# EAGLE board PrePSU (EAGLE 5.07)
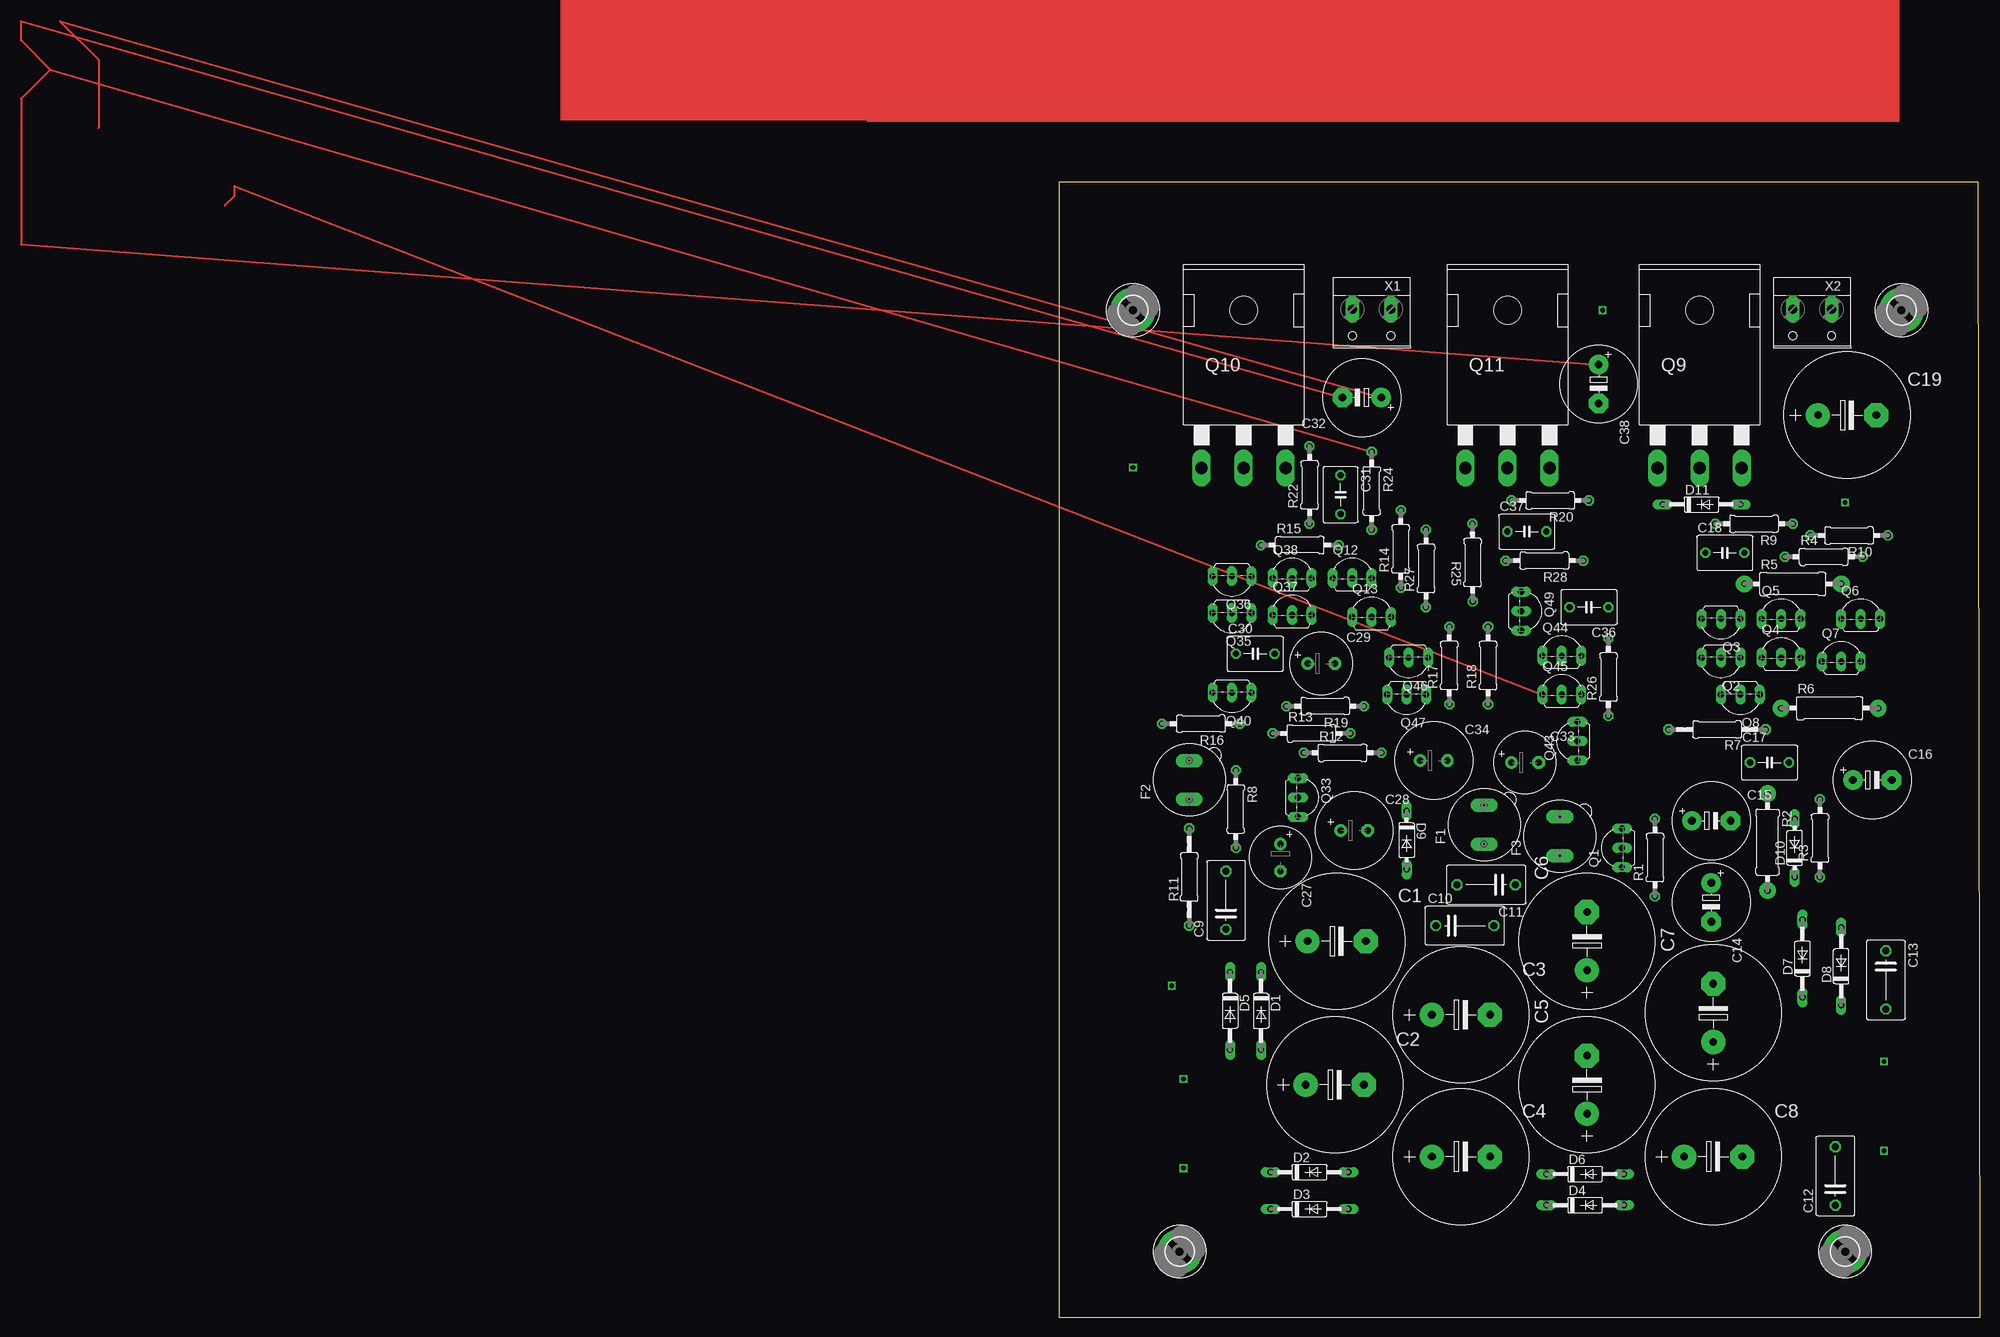
[diagram p0: board, top side]
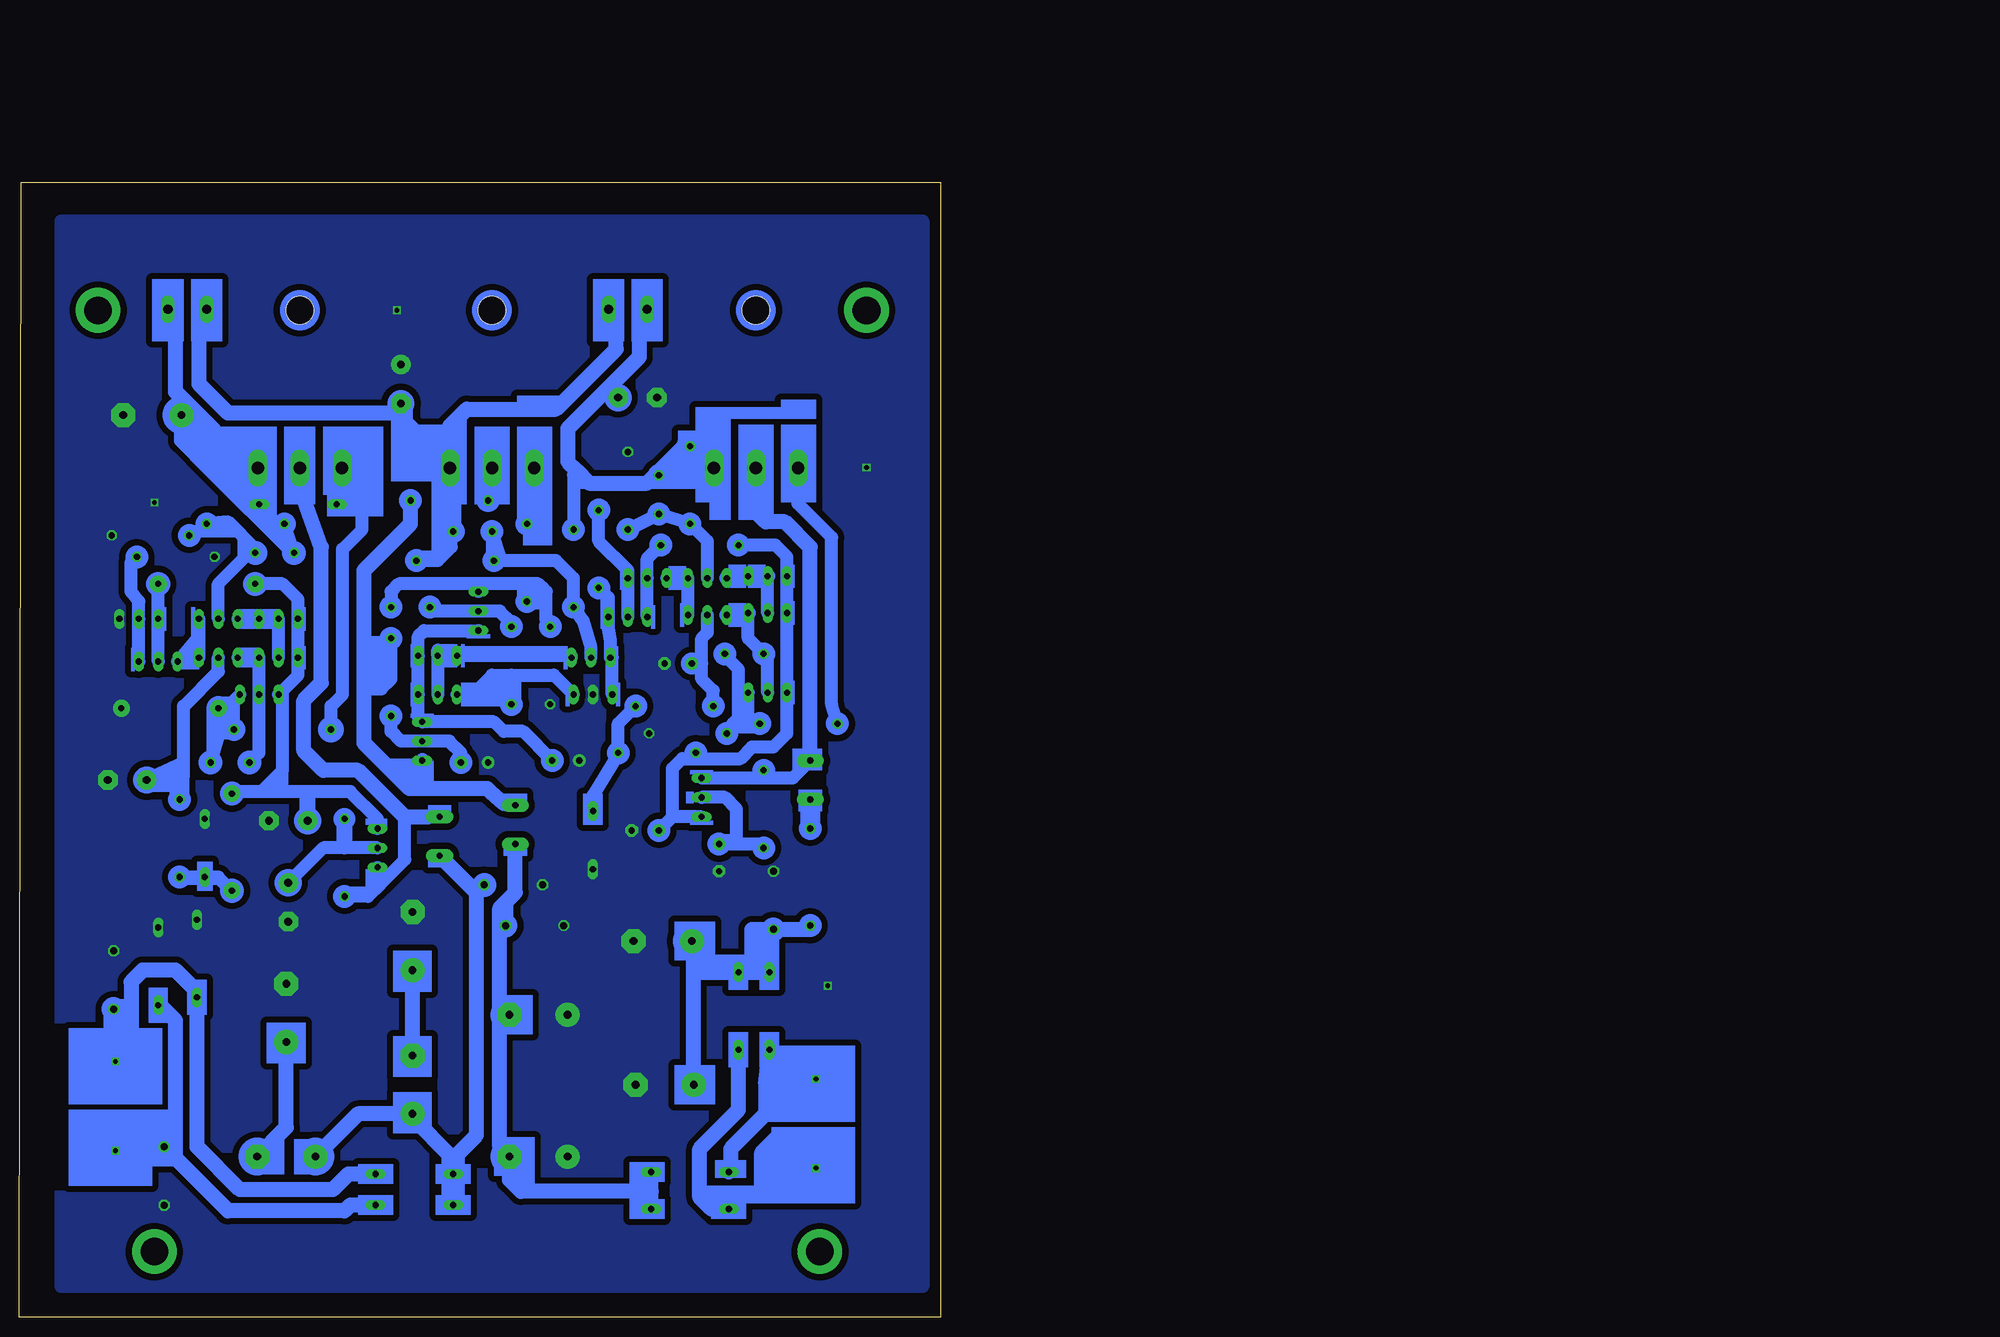
[diagram p1: board, bottom side, seen from below]

Size 120.57 x 148.57 mm. Coordinates in mm from the lower left corner, seen from the top.
Outline: 0,148.57 0,0 120.57,0 120.32,148.57 0,148.57
Copper layers (1*16): Top 0.035mm / dielectric 1.5mm / Bottom 0.035mm
Design rules "default *": minimum track width 10mil, minimum drill 24mil, track to track 8mil, track to pad 8mil, pad to pad 8mil, via to via 8mil, smd to smd 8mil, copper to edge 40mil, drill to drill 8mil, minimum pad ring 10mil, minimum via ring 8mil, stop-mask expansion 4mil, vias tented up to drill 0mil, thermal gap 10mil

## Footprints (pad centres in the part's own frame; a part is rotated, then mirrored left to right if it is on the bottom)
E7,5-18 = drill 1.016 pad 3.15 round: + -3.81,0 | drill 1.016 pad 3.15 octagon: - 3.81,0
C075-052X106 = drill 0.914 octagon: 1 -3.81,0; 2 3.81,0
E5-10,5 = drill 1.016 pad 2.54 round: + -2.54,0 | drill 1.016 pad 2.54 octagon: - 2.54,0
C050-045X075 = drill 0.813 octagon: 1 -2.54,0; 2 2.54,0
E7,5-16 = drill 1.016 pad 3.15 round: + -3.81,0 | drill 1.016 pad 3.15 octagon: - 3.81,0
E3,5-8 = drill 0.813 pad 1.6 round: + -1.778,0 | drill 0.813 pad 1.6 octagon: - 1.778,0
E3,5-10 = drill 0.813 pad 1.6 round: + -1.778,0 | drill 0.813 pad 1.6 octagon: - 1.778,0
DO35-10 = drill 0.813 long: A 5.08,0; C -5.08,0
DO35-7 = drill 0.813 long: A 3.81,0; C -3.81,0
19560 = drill 0.813 pad 1.778 long: 1 -2.54,0; 2 2.54,0
3,6-PAD = drill 3.6 pad 5.842 round: B3,6 0,0
TO92-EBC = drill 0.813 long: B 0,-1.27; C -2.54,-1.27; E 2.54,-1.27
TO-247AD-H = drill 1.6 long: D 0,-20.65; G -5.5,-20.65; S 5.5,-20.65 | hole 3.65: 0,0
0207/10 = drill 0.813 octagon: 1 -5.08,0; 2 5.08,0
0309/12 = drill 0.8 pad 2.184 round: 1 -6.35,0; 2 6.35,0
0207/12 = drill 0.813 octagon: 1 -6.35,0; 2 6.35,0
W237-132 = drill 1.194 long: 1 -2.54,-0.635; 2 2.54,-0.635

## Placement (x,y rotation side)
C1  2200uF  [E7,5-18]  36.32,49.26 0 top
C2  2200uF  [E7,5-18]  36.07,30.46 0 top
C3  2200uF  [E7,5-18]  52.58,39.6 0 top
C4  2200uF  [E7,5-18]  52.58,21.06 0 top
C5  2200uF  [E7,5-18]  69.09,30.46 90 top
C6  2200uF  [E7,5-18]  69.09,49.26 90 top
C7  2200uF  [E7,5-18]  85.6,39.86 90 top
C8  2200uF  [E7,5-18]  85.6,21.06 0 top
C9  68nF  [C075-052X106]  21.84,54.59 90 top
C10  68nF  [C075-052X106]  53.09,51.29 0 top
C11  68nF  [C075-052X106]  55.88,56.62 180 top
C12  68nF  [C075-052X106]  101.6,18.52 90 top
C13  68nF  [C075-052X106]  108.2,44.18 270 top
C14  100uF  [E5-10,5]  85.34,54.34 270 top
C15  100uF  [E5-10,5]  85.34,65 0 top
C16  100uF  [E5-10,5]  106.43,70.34 0 top
C17  3n9  [C050-045X075]  92.96,72.62 0 top
C18  220pF  [C050-045X075]  87.12,100.06 0 top
C19  100uF  [E7,5-16]  103.12,118.09 0 top
C27  100uF  [E3,5-8]  28.96,60.18 270 top
C28  330uF  [E3,5-10]  38.61,63.73 0 top
C29  100uF  [E3,5-8]  34.29,85.58 0 top
C30  2n2  [C050-045X075]  25.65,86.85 0 top
C31  220pF  [C050-045X075]  36.83,107.68 270 top
C32  100uF  [E5-10,5]  39.62,120.38 180 top
C33  100uF  [E3,5-8]  60.96,72.62 0 top
C34  330uF  [E3,5-10]  49.02,72.88 0 top
C36  2n2  [C050-045X075]  69.34,92.94 180 top
C37  220pF  [C050-045X075]  61.21,102.85 0 top
C38  100uF  [E5-10,5]  70.61,122.15 270 top
D1  1A  [DO35-10]  26.42,40.11 270 top
D2  1A  [DO35-10]  32.77,19.03 0 top
D3  1A  [DO35-10]  32.77,14.2 0 top
D4  1A  [DO35-10]  68.83,14.71 0 top
D5  1A  [DO35-10]  22.35,40.11 270 top
D6  1A  [DO35-10]  68.83,18.78 0 top
D7  1A  [DO35-10]  97.28,46.97 90 top
D8  1A  [DO35-10]  102.36,45.95 90 top
D9  7V5  [DO35-7]  45.47,62.46 270.3 top
D10  12V  [DO35-7]  96.27,61.45 90 top
D11  12V  [DO35-10]  84.07,106.41 0 top
F1  500mA  [19560]  55.63,64.5 90 top
F2  500mA  [19560]  17.02,70.34 90 top
F3  500mA  [19560]  65.53,62.97 90 top
H1  MOUNT-PAD-ROUND3.6  [3,6-PAD]  15.75,8.62 0 top
H2  MOUNT-PAD-ROUND3.6  [3,6-PAD]  102.87,8.62 0 top
H3  MOUNT-PAD-ROUND3.6  [3,6-PAD]  9.65,131.81 0 top
H4  MOUNT-PAD-ROUND3.6  [3,6-PAD]  110.24,131.81 0 top
Q1  BC546B  [TO92-EBC]  72.39,61.45 90 top
Q2  BC556B  [TO92-EBC]  86.61,85.07 180 top
Q3  BC556B  [TO92-EBC]  86.61,90.15 180 top
Q4  BC546B  [TO92-EBC]  94.49,87.61 0 top
Q5  BC546B  [TO92-EBC]  94.49,92.69 0 top
Q6  BC546B  [TO92-EBC]  104.9,92.69 0 top
Q7  BC546B  [TO92-EBC]  102.36,87.1 0 top
Q8  BC556B  [TO92-EBC]  89.15,80.24 180 top
Q9  NPN  [TO-247AD-H]  83.82,131.81 0 top
Q10  NPN  [TO-247AD-H]  24.13,131.81 0 top
Q11  PNP  [TO-247AD-H]  58.67,131.81 0 top
Q12  BC546B  [TO92-EBC]  38.35,98.02 0 top
Q13  BC546B  [TO92-EBC]  40.89,92.94 0 top
Q33  BC546B  [TO92-EBC]  32.51,68.05 270 top
Q35  BC556B  [TO92-EBC]  22.61,90.91 180 top
Q36  BC556B  [TO92-EBC]  22.61,95.74 180 top
Q37  BC546B  [TO92-EBC]  30.48,93.2 0 top
Q38  BC546B  [TO92-EBC]  30.48,98.02 0 top
Q40  BC556B  [TO92-EBC]  22.61,80.5 180 top
Q43  BC556B  [TO92-EBC]  66.55,75.42 90 top
Q44  BC546B  [TO92-EBC]  65.79,87.86 0 top
Q45  BC546B  [TO92-EBC]  65.79,82.78 0 top
Q46  BC556B  [TO92-EBC]  45.72,85.07 180 top
Q47  BC556B  [TO92-EBC]  45.47,80.24 180 top
Q49  BC546B  [TO92-EBC]  61.72,92.44 270 top
R1  12K  [0207/10]  77.98,60.18 90 top
R2  39K  [0309/12]  92.71,62.21 270 top
R3  1K  [0207/10]  99.57,62.72 90 top
R4  330R  [0207/10]  100.08,99.55 0 top
R5  47K  [0309/12]  96.01,95.99 0 top
R6  39K  [0309/12]  100.84,79.74 0 top
R7  100R  [0207/12]  86.11,76.94 180 top
R8  9K1  [0207/10]  23.11,66.53 270 top
R9  100K  [0207/10]  90.93,103.87 180 top
R10  18K  [0207/10]  103.38,102.34 180 top
R11  0  [0207/12]  17.02,57.64 90 top
R12  3K3  [0207/10]  37.08,73.89 0 top
R13  6K8  [0207/10]  33.02,76.43 0 top
R14  330R  [0207/10]  44.7,100.56 90 top
R15  6K8  [0207/10]  31.5,101.07 0 top
R16  100  [0207/10]  18.54,77.7 180 top
R17  6K8  [0207/10]  51.05,85.32 90 top
R18  0  [0207/10]  56.13,85.32 90 top
R19  1K  [0207/10]  34.8,79.99 180 top
R20  0  [0207/10]  64.26,106.91 180 top
R22  4K7  [0207/10]  32.77,108.95 90 top
R24  4K7  [0207/10]  40.89,108.18 270 top
R25  100  [0207/10]  54.1,98.79 90.2 top
R26  9K1  [0207/10]  71.88,83.8 90 top
R27  4K7  [0207/10]  48.01,98.02 90 top
R28  4K7  [0207/10]  63.5,99.04 180 top
X1  [W237-132]  40.89,131.3 180 top
X2  [W237-132]  98.55,131.3 180 top

## Library data of the parts
C1-C19 C27-C34 C36-C38 R1-R20 R22 R24-R28 = resistor
D1-D11 = diode
F1-F3 = fuse
H1-H4 = holes
Q1 Q4-Q7 Q12 Q13 Q33 Q37 Q38 Q44 Q45 Q49 = transistor-npn
Q2 Q3 Q8 Q35 Q36 Q40 Q43 Q46 Q47 = transistor-pnp
Q9-Q11 = transistor-power
X1 X2 = con-wago-508

## Nets
GNDA: C1.- C2.- C3.+ C4.+ C6.- C7.- C9.2 C10.1 C11.2 C12.1 C13.1 C14.- C15.- C16.- C19.- C27.- C28.- C29.- C32.- C33.+ C34.+ C38.+ D7.A D8.A D9.A D10.A Q6.E Q47.B R4.1 R6.2 R10.1 R13.2 R17.1 R24.1
N$1: F2.1 R11.2
N$2: D1.A D3.C
N$3: C1.+ C2.+ C9.1 D1.C D5.C R11.1
N$4: C3.- C4.- C10.2 D2.A D3.A F1.1
N$6: C5.+ C8.+ C11.1 D4.C D6.C F3.1
N$7: F2.2 Q10.D Q33.C R8.1
N$8: C34.- Q43.E Q44.E Q45.E Q49.E
N$9: C5.- C6.+
N$10: C7.+ C8.-
N$11: C31.2 Q38.B R22.1 R24.2
N$12: C12.2 D4.A D8.C
N$13: C13.2 D6.A D7.C
N$17: F3.2 Q1.C Q9.D R1.1
N$18: C14.+ Q1.B R1.2
N$19: D10.C R2.2 R3.1
N$20: C16.+ Q4.B R3.2
N$21: C15.+ Q1.E Q2.E Q3.E Q8.E R2.1 R5.1
N$22: C17.1 Q2.C Q4.C Q8.B
N$23: Q6.B Q7.E R4.2
N$24: Q2.B Q3.B Q3.C Q5.C
N$26: Q4.E Q5.E Q7.C
N$27: Q6.C Q7.B R5.2
N$28: D11.C Q9.G R7.2
N$29: C17.2 Q8.C R6.1 R7.1
N$30: C18.2 Q5.B R9.1 R10.2
N$31: C18.1 C19.+ D11.A Q9.S R9.2 X2.1
N$32: Q12.E Q13.B R14.2
N$33: Q13.E Q46.E Q47.E R14.1
N$34: F1.2 Q43.C R20.1 R26.2
N$35: Q12.B Q13.C R15.2
N$36: Q10.G R16.2
N$37: Q11.G R25.2
N$38: Q45.C Q47.C R18.1
N$39: Q11.D R20.2
N$55: C27.+ Q33.B R8.2
N$56: C28.+ Q33.E Q35.E Q36.E Q40.E R12.1 R15.1
N$57: D9.C R12.2 R19.1
N$60: C29.+ Q37.B R19.2
N$61: Q35.B Q36.B Q36.C Q38.C
N$62: Q12.C Q37.E Q38.E
N$63: C30.1 Q35.C Q37.C Q40.B
N$64: C30.2 Q40.C R13.1 R16.1
N$66: C37.2 C38.- Q11.S R28.1 X1.1 X2.2
N$67: C33.- Q43.B R26.1
N$69: Q44.B Q44.C Q45.B Q46.C
N$70: C36.2 Q49.B R18.2
N$71: C36.1 Q49.C R17.2 R25.1
N$73: C37.1 Q46.B R27.1 R28.2
N$76: C31.1 C32.+ Q10.S R22.2 R27.2 X1.2
N$88: D2.C D5.A

## Tracks (layer width: path | path; a pad name or v marks a point on that pad's centre or on a via)
GNDA  (via drill 0.6)
  Top 0.254: -132.08,163.3 -135.89,167.11 -135.89,169.65 C32.- | -132.08,163.3 -135.89,159.49 -135.89,140.44 C38.+ | -132.08,163.3 R24.1
  other vias: 14.73,43.41 9.65,111.23 102.87,106.66 71.12,131.81
  pour Bottom (isolate 0.813, no thermals): 2.29,143.49 2.29,4.04 115.06,4.04 115.06,143.49
N$1
  Bottom 1.93: R11.2 F2.1
N$2  (via drill 0.6)
  Bottom 1.93: D1.A 26.42,27.16 31.5,22.08 31.5,15.73 29.97,14.2 D3.C 27.69,15.73 27.18,16.24 20.07,16.24 v16.26,19.54
N$3
  Bottom 1.93: C1.+ 32.26,49 32.26,45.19 | C2.+ 32.26,45.19 | 24.64,45.19 D1.C 32.26,45.19 | 24.64,45.19 D5.C | 24.64,45.19 24.64,50.78 C9.1 17.53,50.78 | 17.53,50.78 R11.1 | 17.53,50.78 17.27,50.78
N$4
  Bottom 1.676: 55.63,61.45 F1.1
  Bottom 1.93: D3.A 37.85,16.49 | 37.85,16.49 D2.A | 37.85,16.49 54.86,16.49 56.39,18.01 C4.- 57.66,22.33 57.66,38.33 C3.- 57.66,40.87 57.66,51.29 | 57.66,51.29 57.66,53.57 55.63,55.61 55.63,61.45 | 57.66,51.29 C10.2
N$6
  Bottom 1.676: 65.02,59.92 F3.1
  Bottom 1.93: C8.+ 76.2,26.65 C5.+ 69.09,26.14 63.88,20.94 63.63,20.94 | D4.C D6.C | D6.C 64.01,19.03 | 60.45,55.86 60.71,55.61 60.71,23.86 63.63,20.94 | 60.45,55.86 C11.1 | 63.63,20.94 63.75,20.81 D6.C | 60.45,55.86 60.96,55.86 65.02,59.92
N$7
  Bottom 1.676: F2.2 19.3,70.59 23.11,70.59 | 23.11,70.59 Q33.C | 23.11,70.59 R8.1
  Bottom 1.93: F2.2 17.02,100.82 20.32,104.12 22.86,104.12 24.13,105.39 Q10.D
N$8
  Bottom 1.676: Q49.E 67.56,89.9 68.33,89.13 Q44.E Q45.E 68.33,78.47 Q43.E 58.42,77.96 57.15,76.69 54.61,76.69 C34.-
N$9
  Bottom 1.93: C5.- C6.+
N$10
  Bottom 1.93: C8.- 85.6,24.87 C7.+
N$11
  Bottom 1.676: R24.2 C31.2 R22.1 30.48,101.58 Q38.B
N$12
  Bottom 1.93: 100.08,20.81 93.22,13.95 77.98,13.95 77.22,14.71 D4.A | 100.08,20.81 100.08,38.84 102.11,40.87 D8.C | C12.2 100.33,20.81 100.08,20.81
N$13
  Bottom 1.93: D6.A 77.47,18.78 79.5,16.74 91.69,16.74 97.28,22.33 D7.C 97.28,42.65 100.08,45.45 104.39,45.45 105.92,43.92 105.92,40.37 | 105.92,40.37 105.92,36.56 | 105.92,40.37 C13.2
N$14
  Bottom 1.93: 20.57,23.86 21.08,23.86 23.37,21.57 23.37,16.74
N$15  (via drill 0.6)
  other vias: 107.95,33.51
N$16  (via drill 0.6)
  other vias: 107.95,21.82
N$17
  Bottom 1.676: R1.1 74.93,55.1 73.28,56.75 | 73.28,56.75 70.1,59.92 70.1,65.51 | Q1.C 73.66,57.13 73.28,56.75 | 67.06,65.51 F3.2
  Bottom 1.93: Q9.D 83.57,107.93 81.03,100.82 81.03,83.04 83.31,80.75 83.31,74.15 80.77,71.61 76.2,71.61 70.1,65.51 67.06,65.51
N$18
  Bottom 1.676: Q1.B 77.98,61.45 | 77.98,61.45 80.77,61.45 C14.+ | 77.98,61.45 R1.2
N$19
  Bottom 1.676: R2.2 94.49,57.64 D10.C R3.1
N$20
  Bottom 1.676: Q4.B 94.49,84.56 99.06,79.99 99.06,72.62 | 99.82,67.8 R3.2 99.06,68.05 99.57,68.56 99.57,70.34 99.06,70.85 99.06,72.62 | 99.06,72.62 C16.+
N$21
  Bottom 1.676: Q1.E 73.66,65.26 77.22,68.81 82.8,68.81 | R5.1 86.11,95.99 84.07,93.96 Q3.E Q2.E 84.07,84.05 Q8.E 86.36,81.51 86.11,81.77 86.11,71.61 88.9,68.81 | R2.1 92.46,68.81 88.9,68.81 | 82.8,68.81 88.9,68.81 | 82.8,68.81 C15.+
N$22
  Bottom 1.676: Q4.C Q2.C Q8.B 89.15,73.89 C17.1
N$23
  Bottom 1.676: Q7.E Q6.B 104.9,93.71 105.92,94.98 105.92,98.79 R4.2
N$24
  Bottom 1.676: Q5.C Q3.C Q3.B Q2.B
N$26
  Bottom 1.676: Q4.E 97.03,88.88 | 97.03,88.88 Q5.E | Q7.C 97.28,88.88 97.03,88.88
N$27
  Bottom 1.676: Q7.B Q6.C R5.2
N$28
  Bottom 1.676: R7.2 79.76,79.99 78.23,81.51 78.23,100.56 75.69,103.1 75.69,106.91 76.45,107.68 78.23,107.68 | 78.23,107.68 78.23,106.41 D11.C | 78.23,107.68 78.23,109.2 78.32,109.29 Q9.G
N$29
  Bottom 1.676: 93.85,79.36 94.23,78.97 94.23,76.94 | 93.85,79.36 Q8.C | 94.23,76.94 C17.2 | R6.1 93.85,77.07 93.85,79.36 | R7.1 94.23,76.94
N$30
  Bottom 1.676: R10.2 95.25,103.87 R9.1 93.22,104.12 89.66,100.56 C18.2 90.17,100.31 94.49,95.99 Q5.B
N$31
  Bottom 1.676: C18.1 R9.2 | Q9.S D11.A
  Bottom 1.93: 95,111.16 Q9.S | 95.68,111.16 95,111.16 | C18.1 95.68,111.16 | 95,111.16 95,116.06 100.08,121.14 100.08,130.54 101.09,131.55 X2.1 | 95.68,111.16 99.31,114.79 C19.+
N$32
  Bottom 1.676: Q13.B Q12.E 40.89,97.77 44.7,101.58 R14.2
N$33
  Bottom 1.676: R14.1 43.43,94.21 Q13.E 43.43,90.15 43.18,88.63 Q46.E 42.93,86.34 Q47.E
N$34
  Bottom 1.27: F1.2 55.88,67.29 57.15,67.29
  Bottom 1.676: 67.82,69.2 67.95,69.32 69.6,69.32 | R26.2 71.88,83.55 73.15,82.28 75.44,82.28
  Bottom 1.93: 57.15,67.29 59.31,69.2 67.82,69.2 | 67.82,69.2 69.47,69.2 69.6,69.32 75.44,75.16 75.44,82.28 75.44,97.77 69.34,103.87 R20.1 | 67.82,69.2 Q43.C
N$35
  Bottom 1.676: R15.2 38.35,99.29 Q12.B Q13.C
N$36
  Bottom 1.676: R16.2 14.22,80.24 14.22,102.09 18.63,106.49 Q10.G
N$37
  Bottom 1.676: R25.2 53.17,106.51 Q11.G
N$38
  Top 0.254: -109.22,145.52 -107.95,146.79 -107.95,148.06 Q45.C
  Bottom 1.676: Q47.C 50.55,84.05 56.13,84.05 | 56.13,84.05 R18.1 | Q45.C 61.21,81.51 58.67,84.05 56.13,84.05
N$39
  Bottom 1.676: R20.2 58.67,107.42 Q11.D
N$55
  Bottom 1.676: Q33.B 28.19,68.05 26.67,66.53 26.67,61.96 | R8.2 23.62,61.96 26.67,61.96 | 26.67,61.96 C27.+
N$56
  Bottom 1.676: 35.05,65.51 C28.+ | Q33.E 35.05,65.51 | 35.05,65.51 34.8,65.77 35.05,66.02 35.05,71.86 33.78,73.13 31.75,73.13 | 31.75,73.13 26.16,73.13 24.64,74.66 21.84,74.66 20.07,76.43 Q40.E Q35.E Q36.E 20.07,99.55 21.59,101.07 R15.1 | 31.75,73.13 R12.1
N$57
  Bottom 1.676: R19.1 42.16,77.7 R12.2 42.16,73.64 45.47,68.31 45.47,66.29 D9.C
N$60
  Bottom 1.676: Q37.B 30.48,89.64 31.24,88.88 31.24,85.58 | 31.24,85.58 31.24,83.55 29.72,82.02 R19.2 | 31.24,85.58 C29.+
N$61
  Bottom 1.676: Q35.B Q36.B
  Bottom 1.93: Q38.C 27.69,97.01 Q36.C Q36.B
N$62
  Bottom 1.676: Q12.C Q38.E Q37.E
N$63
  Bottom 1.676: Q40.B 22.61,86.34 C30.1 25.15,88.88 Q35.C
  Bottom 1.93: Q37.C 27.69,92.18 Q35.C
N$64
  Bottom 1.676: 27.18,77.7 R13.1 | 27.18,77.7 26.42,78.47 26.42,81.77 | 26.42,81.77 26.42,84.82 28.19,86.59 C30.2 | 26.42,81.77 Q40.C | R16.1 27.18,77.7
N$66
  Bottom 1.676: 63.5,110.48 Q11.S 64.01,110.99 64.01,109.71 64.01,102.85 | 64.01,102.85 64.01,100.82 65.79,99.04 R28.1 | 64.01,102.85 C37.2 | C38.- 70.36,119.36 70.36,117.84 68.33,115.8 64.26,115.8
  Bottom 1.93: 64.01,109.71 64.01,111.49 | Q11.S 64.17,112.16 64.26,112.25 64.26,115.8 64.26,116.57 61.98,118.85 50.29,118.85 42.42,126.73 42.42,130.54 43.43,131.55 X1.1 | C38.- 70.87,118.34 93.22,118.34 97.03,122.15 97.03,130.92 X2.2
N$67
  Bottom 1.676: R26.1 71.88,76.69 70.61,75.42 Q43.B 64.26,75.42 62.74,73.89 C33.-
N$69
  Bottom 1.676: Q44.B Q45.B | Q44.B 65.79,87.36 | Q44.B Q44.C 48.26,86.59 Q46.C
N$70
  Bottom 1.676: R18.2 56.13,90.91 57.66,92.44 Q49.B 66.8,92.44 C36.2
N$71
  Bottom 1.676: 61.21,95.99 70.87,95.99 71.88,94.98 C36.1 | 61.21,95.99 Q49.C | 61.21,95.99 52.58,95.99 52.2,95.61 | 52.2,95.61 51.56,94.98 51.56,91.17 51.05,90.66 R17.2 | R25.1 52.22,95.61 52.2,95.61
N$73
  Bottom 1.676: Q46.B 45.72,87.61 46.74,91.17 R27.1 48.01,96.75 50.29,99.04 57.4,99.04 | 57.4,99.04 R28.2 | 57.4,99.04 C37.1
N$76
  Top 0.254: -125.73,155.68 -125.73,164.57 -130.81,169.65 C32.+
  Bottom 1.676: R22.2 32.39,113.9 32.39,114.41 | 33.66,113.9 32.64,113.9 | R27.2 48.01,110.22 47.62,110.6 47.62,110.85
  Bottom 1.93: 32.64,113.9 R22.2 32.39,114.41 28.88,111.16 Q10.S | 37.08,110.47 33.66,113.9 | 37.08,110.47 38.35,109.2 45.97,109.2 47.62,110.85 48.77,111.99 48.77,116.31 43.31,121.77 | 37.08,110.47 C31.1 | 43.31,121.77 39.37,125.71 39.37,132.06 39.24,131.93 X1.2 | C32.+ 43.31,121.52 43.31,121.77
N$88  (via drill 0.6)
  Bottom 1.93: D2.C 27.43,19.28 27.43,22.08 22.86,26.65 22.86,30.46 | 22.86,30.46 D5.A | v16.26,31.22 16.51,30.46 22.86,30.46
(copper drawn outside any net)
  shapes: Bottom area x227, Bottom circle x146, Top area x4